# Altium PCB lixie_PCB.PcbDoc
Units mil, origin at the board's own origin, x right, y up, seen from the top; angles counter-clockwise.
Board outline 6000 x 4000 mil, 2 copper layers (Top Layer, Bottom Layer); 14 components, 14 nets, 50 pads, 0 vias.
Unrouted connection lines stored in the file: 36.
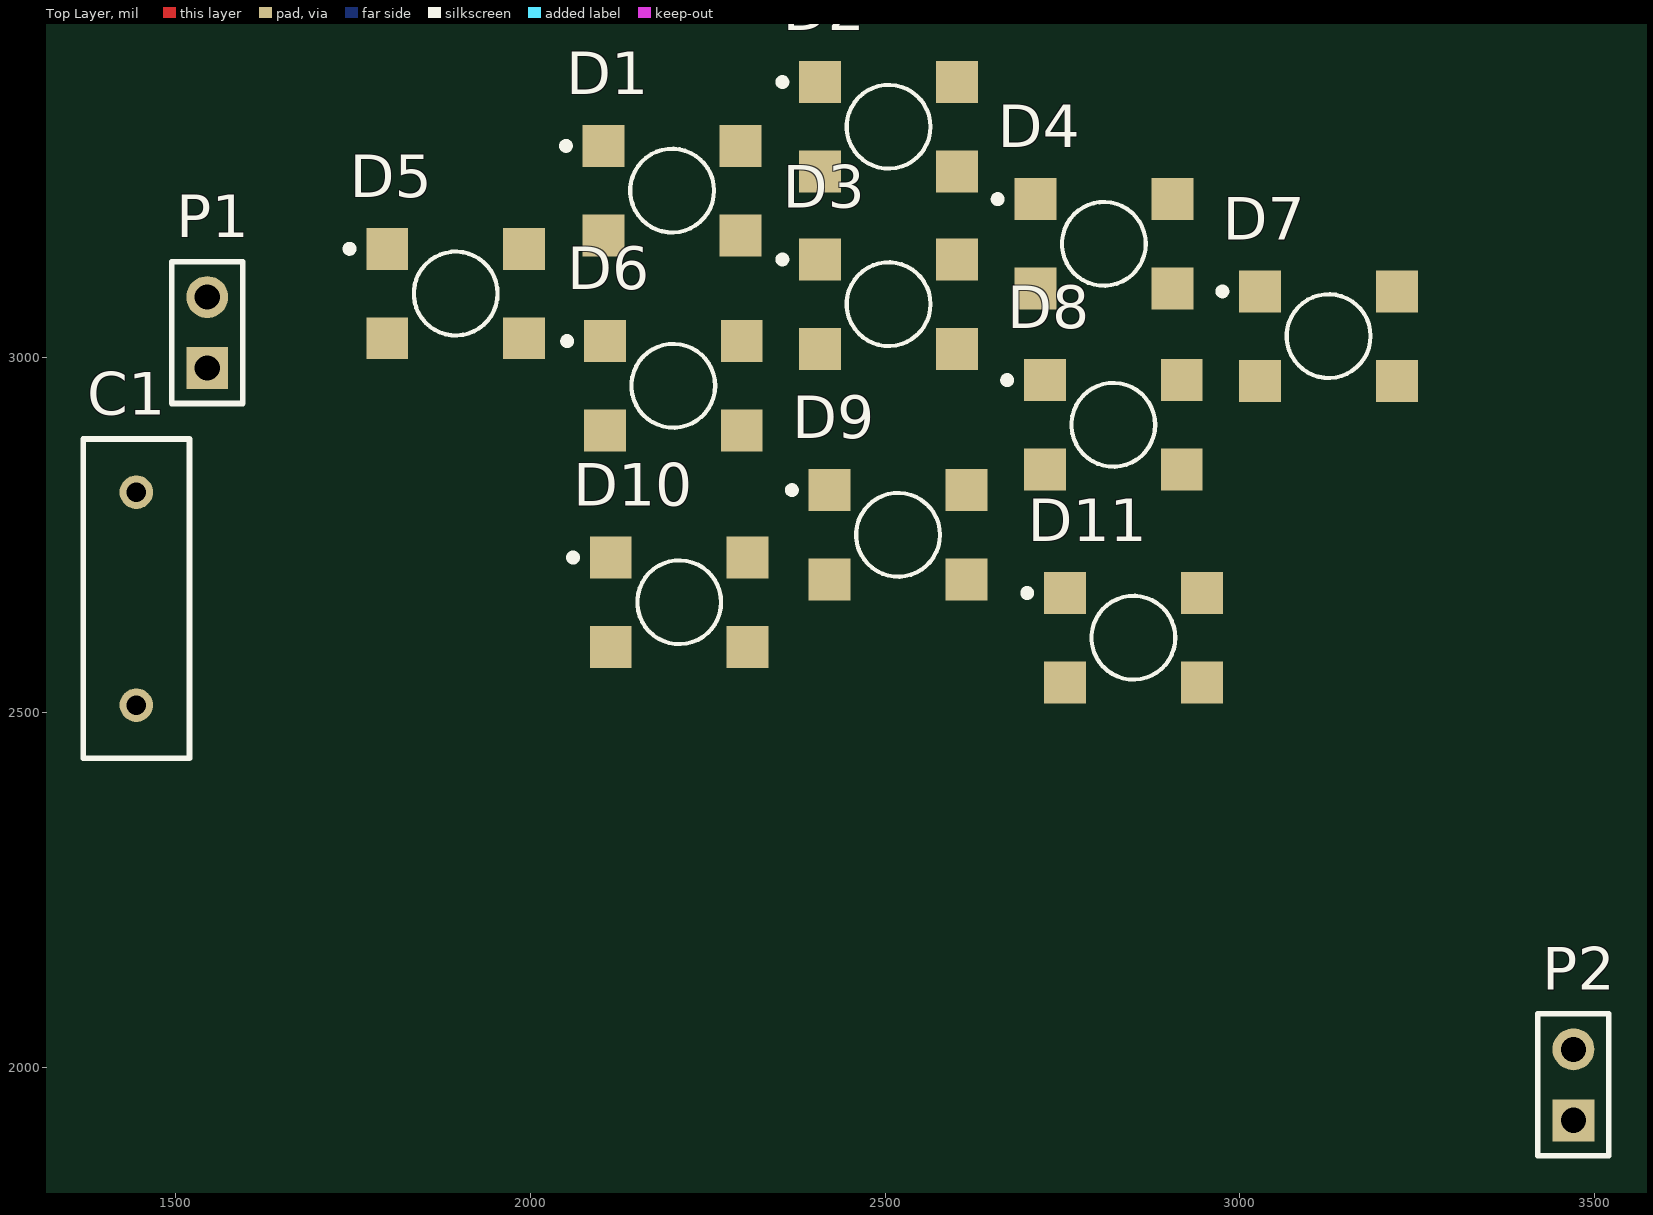
[diagram p0: Top Layer view]
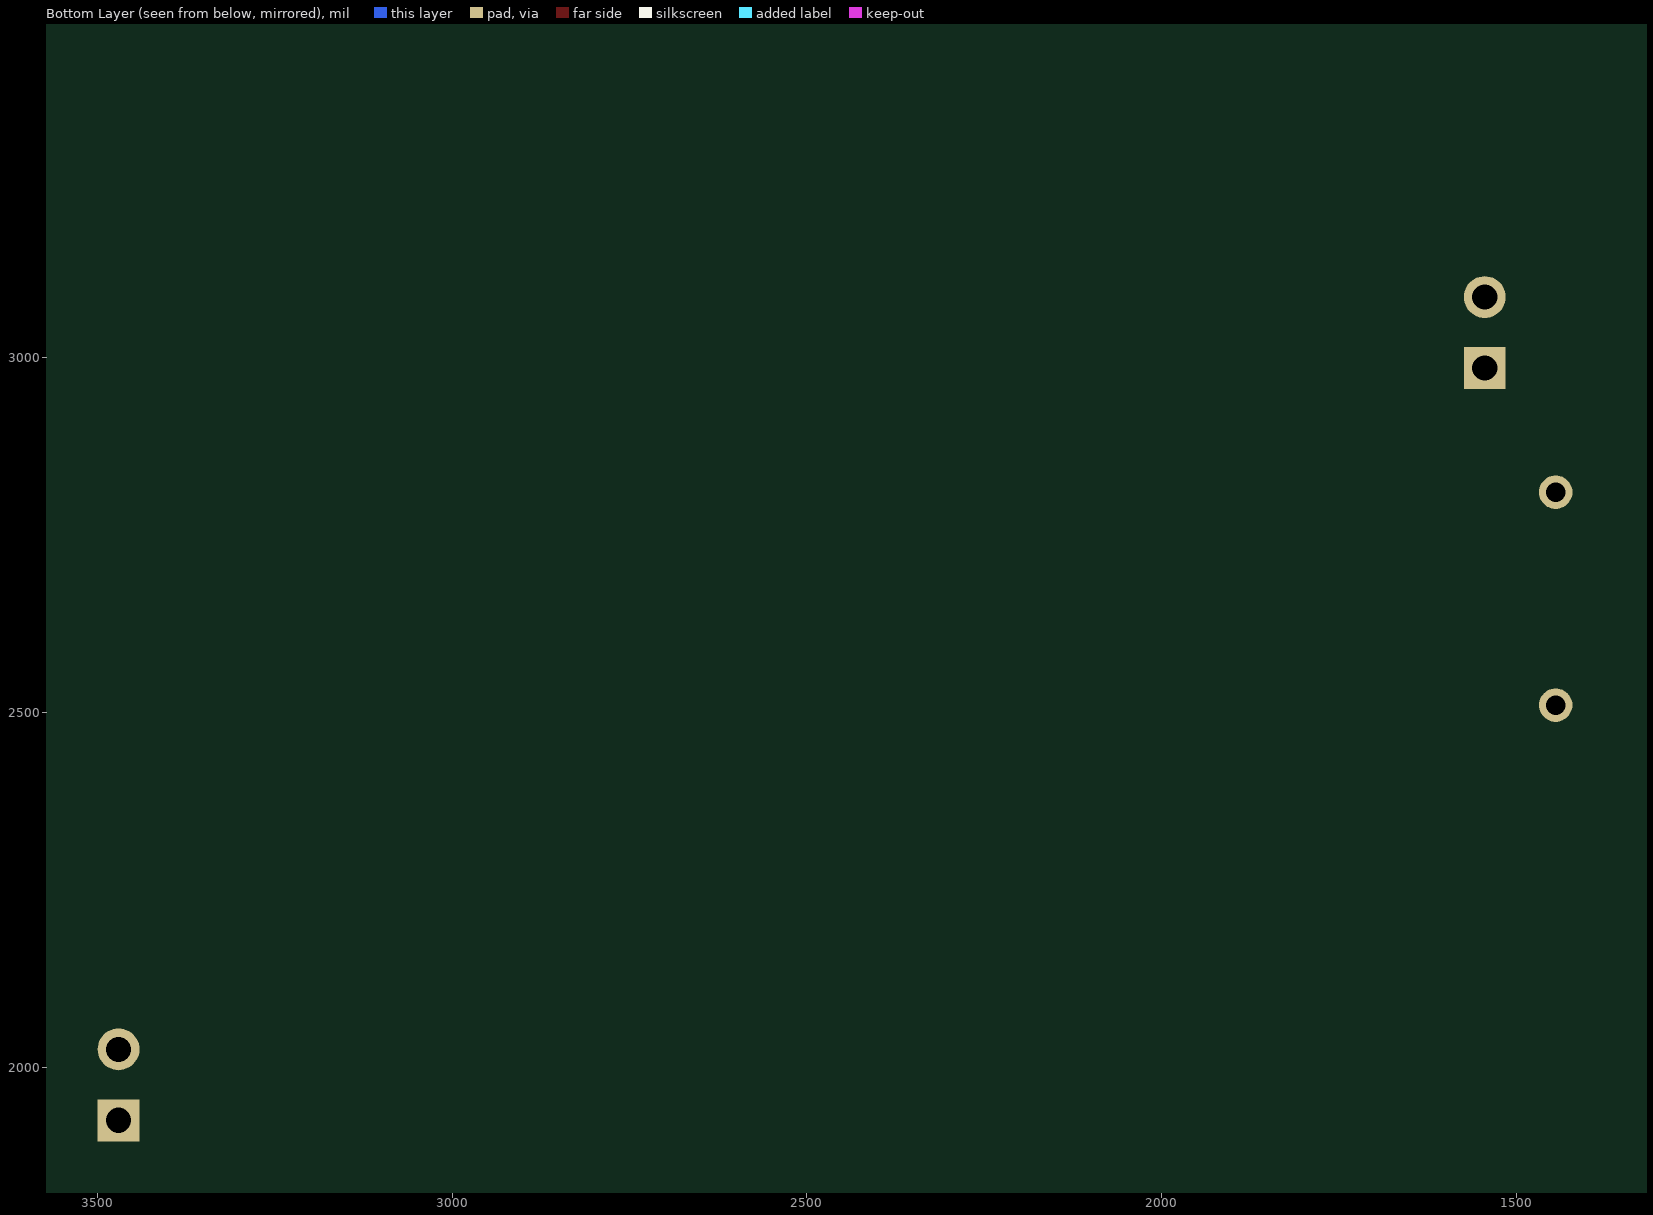
[diagram p1: Bottom Layer view, seen from below]

## Layer stack, top to bottom
Top Solder: solder mask 0.4, Solder Resist, Dk 3.5
Top Layer: signal copper 1.4
Dielectric 1: dielectric 12.6, FR-4, Dk 4.8
Bottom Layer: signal copper 1.4
Bottom Solder: solder mask 0.4, Solder Resist, Dk 3.5

## Board outline
1000,1000 7000,1000 7000,5000 1000,5000

## Design rules (kind name [scope] priority, off if disabled: settings)
Clearance [All] p1: gap=10 ignorepadtopadclearanceinfootprint=FALSE except(0: Arc-Hole Track-Hole SMDPad-Hole THPad-Hole Via-Hole Fill-Hole Poly-Hole Region-Hole Text-Hole)
PolygonConnect [All] p1: connectstyle=Relief reliefconductorwidth=10 reliefentries=4 polygonreliefangle="90 Angle" airgapwidth=10
RoutingVias [All] p1: holewidth=28 width=50 viastyle="Through Hole" minholewidth=28 minwidth=50 maxholewidth=28 maxwidth=50
SolderMaskExpansion [All] p1: expansion=4 istentingtop=FALSE
Width [All] p1: maxlimit=10 minlimit=10 preferedwidth=10
30 further rules are at their usual default settings.

## Components (designator, comment, footprint, x,y, rotation, side; value= is the part's Value field where it differs from the comment)
C1 "Cap" RAD-0.3 1445,2660 r90 top value=100pF
D1 "Diode_Adafruit_SK6812-D_eec" Adafruit_SK6812-D_0 2200,3235 r0 top
D2 "Diode_Adafruit_SK6812-D_eec" Adafruit_SK6812-D_0 2505,3325 r0 top
D3 "" Adafruit_SK6812-D_0 2505,3075 r0 top
D4 "Diode_Adafruit_SK6812-D_eec" Adafruit_SK6812-D_0 2808.32,3160 r0 top
D5 "Diode_Adafruit_SK6812-D_eec" Adafruit_SK6812-D_0 1895,3090 r0 top
D6 "Diode_Adafruit_SK6812-D_eec" Adafruit_SK6812-D_0 2201.68,2960 r0 top
D7 "Diode_Adafruit_SK6812-D_eec" Adafruit_SK6812-D_0 3125,3030 r0 top
D8 "Diode_Adafruit_SK6812-D_eec" Adafruit_SK6812-D_0 2821.68,2905 r0 top
D9 "Diode_Adafruit_SK6812-D_eec" Adafruit_SK6812-D_0 2518.37,2750 r0 top
D10 "Diode_Adafruit_SK6812-D_eec" Adafruit_SK6812-D_0 2210,2655 r0 top
D11 "Diode_Adafruit_SK6812-D_eec" Adafruit_SK6812-D_0 2850,2605 r0 top
P1 "Header 2" HDR1X2 1545,2985 r90 top
P2 "Header 2" HDR1X2 3470,1925 r90 top

## Footprints (in the part's own frame and the unit in brackets; to place one, negate y for a bottom-side part, rotate by r counter-clockwise, add the part's x,y. Pads: shape width x height; smd on the part's side, far side on the other; paste and mask are expansions set on the pad)
Adafruit_SK6812-D_0 [mm]
  rect 1.5x1.5 smd paste+0 mask+0: 1(-2.45,1.6) 2(-2.45,-1.6) 3(2.45,-1.6) 4(2.45,1.6)
  silkscreen extent -3.92,-1.5 1.5,1.72, body extent -3.3,-2.6 3.3,2.6, height 0.25
HDR1X2 [mm] "Connector; Header; 2 Position"
  rect 1.5x1.5 hole 0.9: 1(0,0)
  round 1.5 hole 0.9: 2(2.54,0)
  silkscreen extent -1.27,-1.27 3.81,1.27
RAD-0.3 [mm] "Radial Cap, Thru-Hole; 2 Leads; 0.3 in Pin Spacing"
  round 1.2 hole 0.7: 1(-3.81,0) 2(3.81,0)
  silkscreen extent -5.71,-1.91 5.71,1.91

## Part data
C1: "Capacitor", LatestRevisionDate=17-Jul-2002, LatestRevisionNote="Re-released for DXP Platform.", PackageDescription="Radial Cap, Thru-Hole; 2 Leads; 0.3 in Pin Spacing", PackageReference=RAD-0.3, Published=8-Jun-2000, Publisher="Altium Limited"
D1 D2 D4 D5 D6 D7 D8 D9 D10 D11: Manufacturer=Adafruit, Package=SMT_LED_5MM0, Part Number=SK6812-D, Temperature="-40°C to +85°C", Temperature Range High=+85°C, Temperature Range Low=-40°C, ComponentLink1Description=Upverter, ComponentLink1URL=https://upverter.com/upn/revision/c89e73b2d25df682/, ComponentLink2Description=Datasheet, ComponentLink2URL=https://cdn-shop.adafruit.com/product-files/1138/SK6812+LED+datasheet+.pdf, helpURL=https://upverter.com/upn/revision/c89e73b2d25df682/, Ipc Land Pattern Name=SOIC320P540X160-4, Lead Free=yes, RoHS=TRUE, Supplier 1=Digi-Key, Supplier 2=Mouser
D3: library part Diode_Adafruit_SK6812-D_eec, Manufacturer=Adafruit, Package=SMT_LED_5MM0, Part Number=SK6812-D, Temperature="-40°C to +85°C", Temperature Range High=+85°C, Temperature Range Low=-40°C, ComponentLink1Description=Upverter, ComponentLink1URL=https://upverter.com/upn/revision/c89e73b2d25df682/, ComponentLink2Description=Datasheet, ComponentLink2URL=https://cdn-shop.adafruit.com/product-files/1138/SK6812+LED+datasheet+.pdf, helpURL=https://upverter.com/upn/revision/c89e73b2d25df682/, Ipc Land Pattern Name=SOIC320P540X160-4, Lead Free=yes, RoHS=TRUE, Supplier 1=Digi-Key, Supplier 2=Mouser
P1 P2: "Header, 2-Pin", LatestRevisionDate=17-Jul-2002, LatestRevisionNote="Re-released for DXP Platform.", Publisher="Altium Limited"

## Nets (pads, with @x,y where several pads share a name; then routed paths per layer and width w, separated by ;. In a path a pad name is that pad's centre, name@x,y a point inside that pad or via, vN(x,y) a via of type N, cw(c..) or ccw(c..) an arc to the next point about the centre after c; other vN are vias at no path point)
+5: C1.2 D1.3 D2.3 D3.3 D4.3 D5.3 D6.3 D7.3 D8.3 D9.3 D10.3 D11.3 P1.1
DIN00: D1.2 P1.2
DIN01: D1.4 D2.2
DIN02: D2.4 D3.2
DIN03: D3.4 D4.2
DIN04: D4.4 D5.2
DIN05: D5.4 D6.2
DIN06: D6.4 D7.2
DIN07: D7.4 D8.2
DIN08: D8.4 D9.2
DIN09: D9.4 D10.2
DIN10: D10.4 D11.2
DOUT: D11.4 P2.1
GND: C1.1 D1.1 D2.1 D3.1 D4.1 D5.1 D6.1 D7.1 D8.1 D9.1 D10.1 D11.1 P2.2